# EAGLE board 001000-003 (EAGLE 9.4.0), part 1 of 2
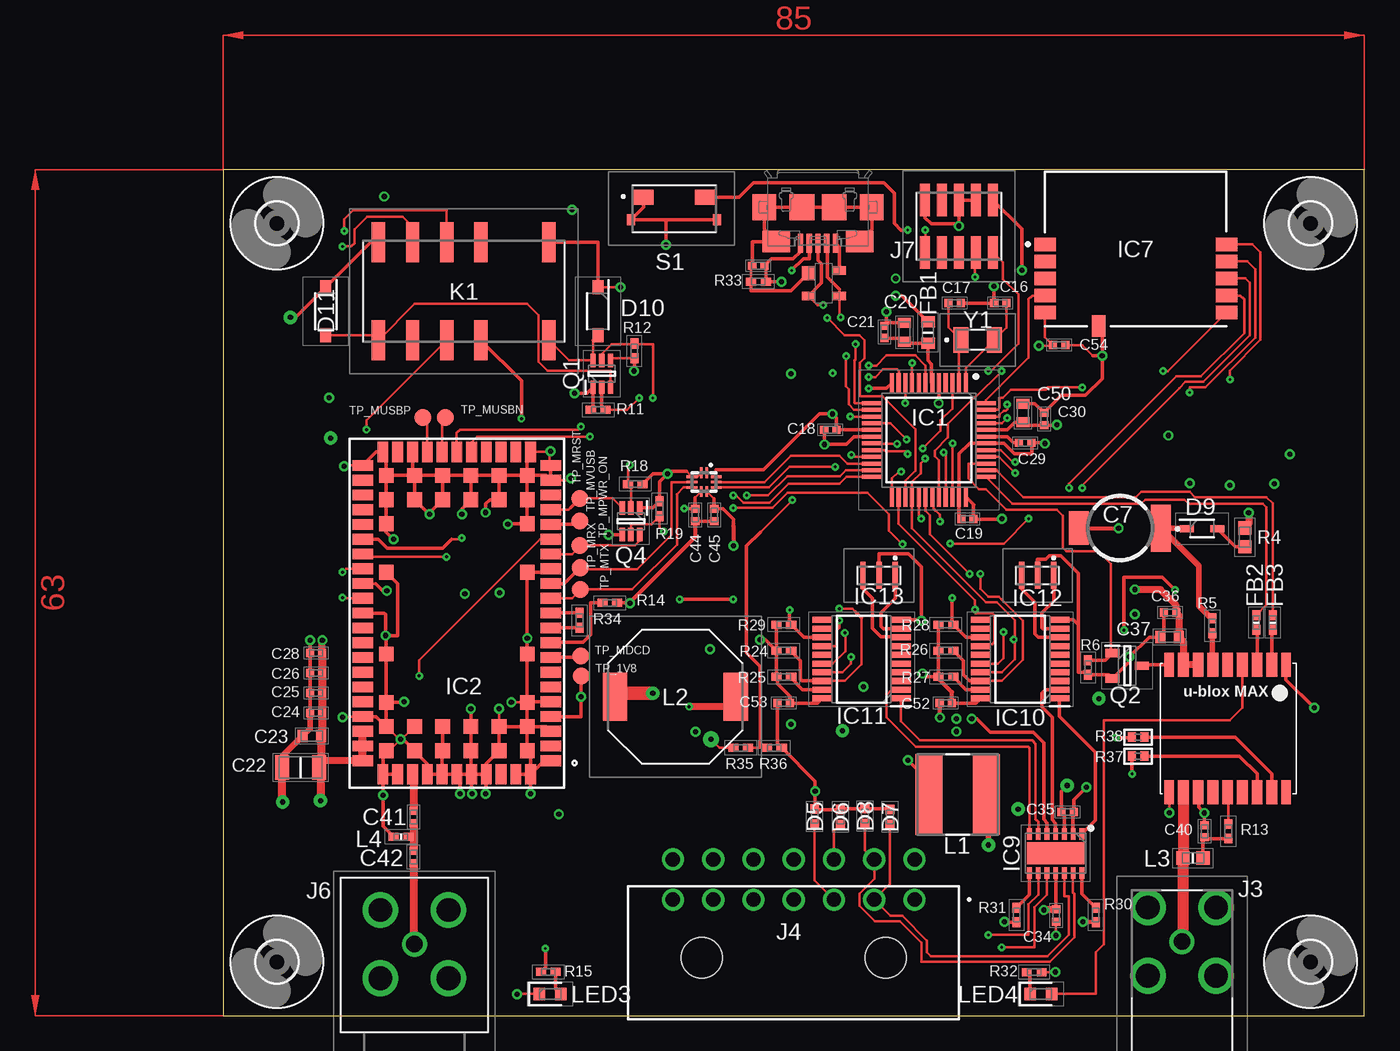
[diagram p0: board, top side]
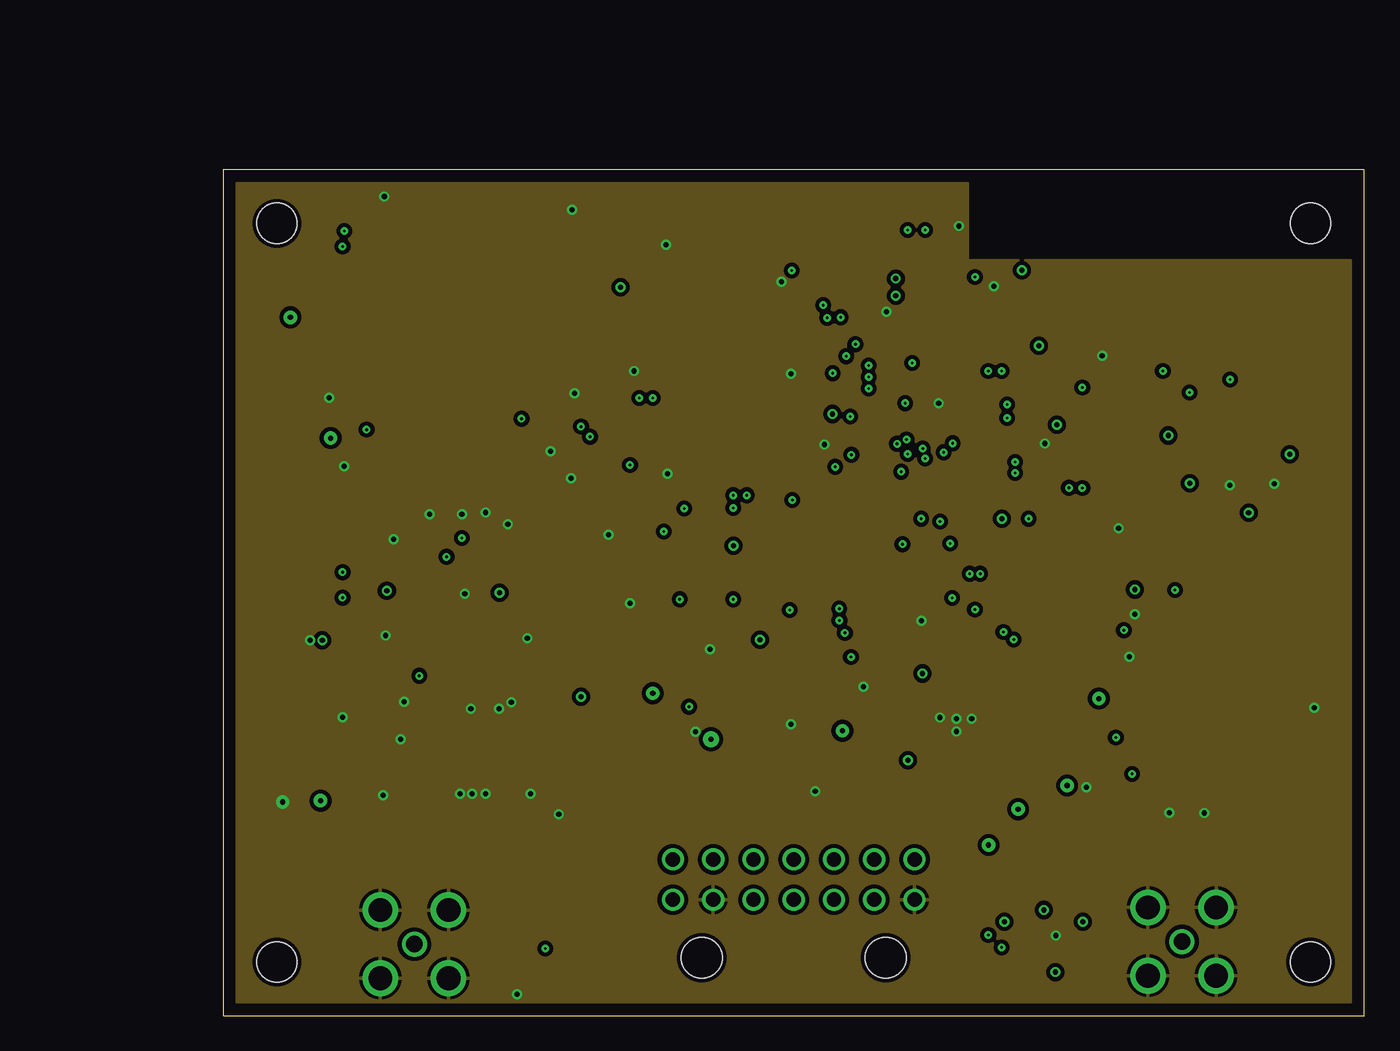
[diagram p1: board, inner layer Route2]
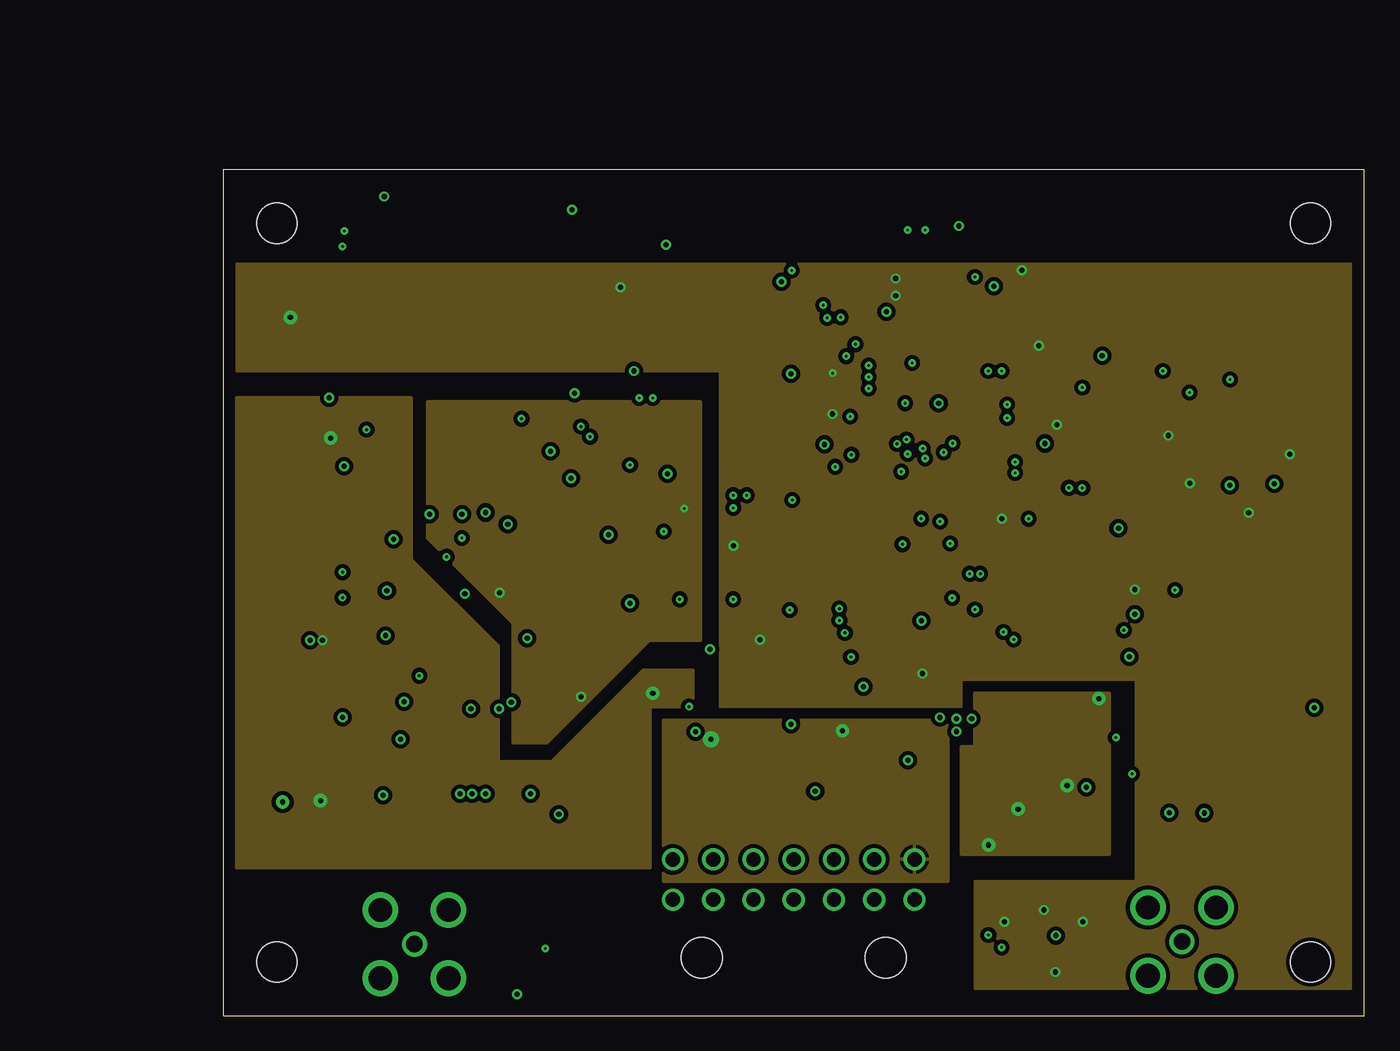
[diagram p2: board, inner layer Route15]
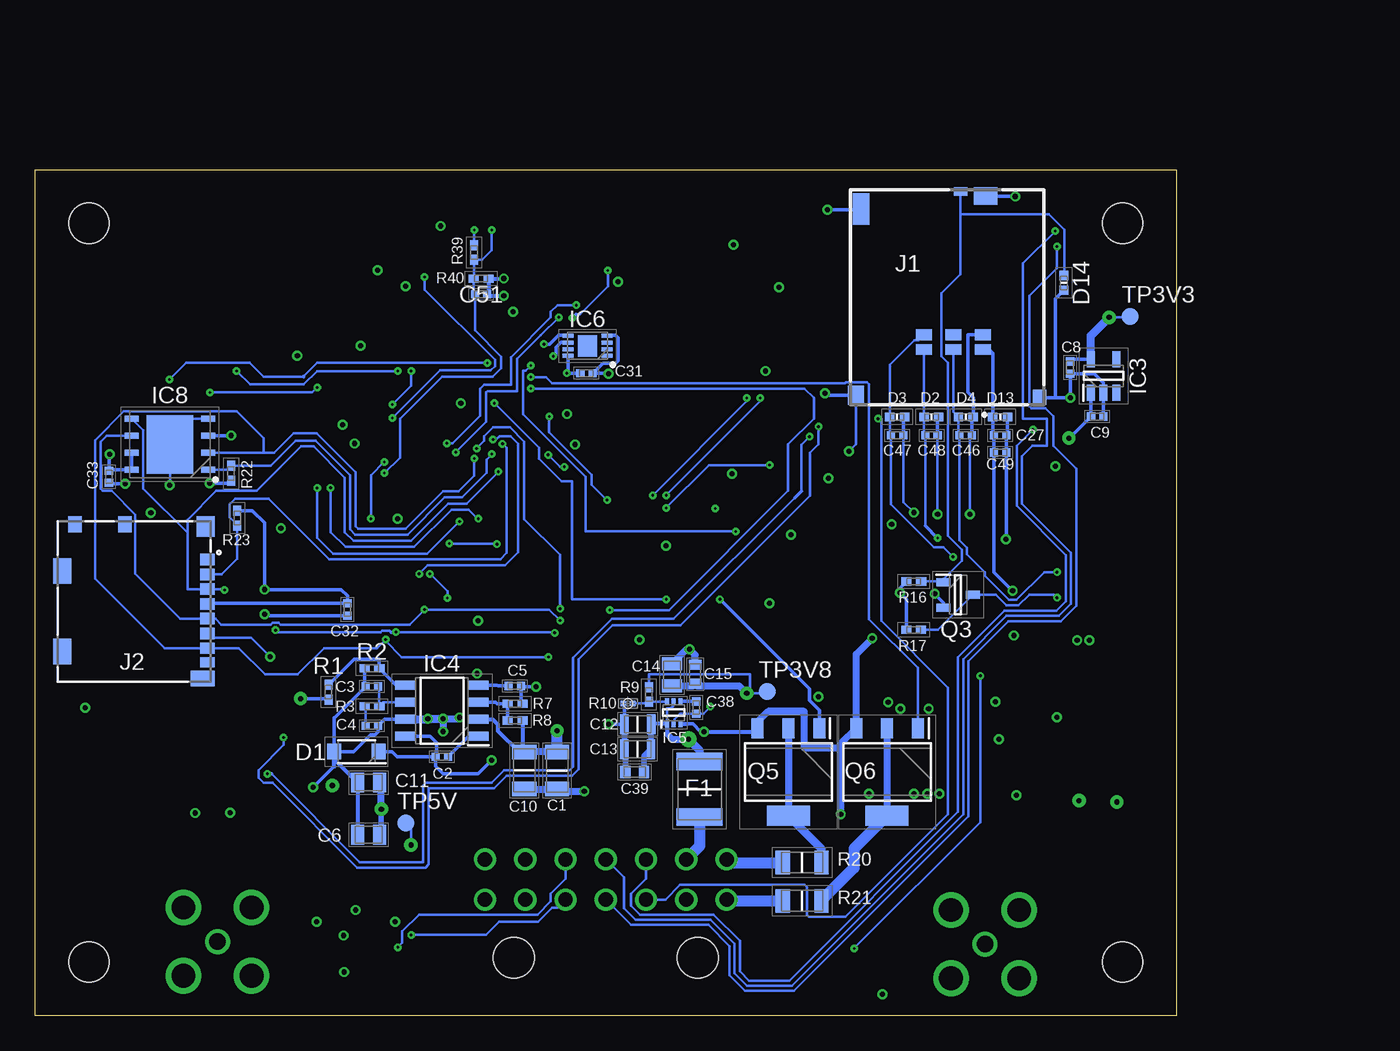
[diagram p3: board, bottom side, seen from below]

Size 85 x 63 mm. Coordinates in mm from the lower left corner, seen from the top.
Outline: 0,0 85,0 85,63 0,63 0,0
Copper layers (1*2*15*16): Top 0.035559375mm / dielectric 0.47751875mm / Route2 0.035559375mm / dielectric 0.47751875mm / Route15 0.035559375mm / dielectric 0.47751875mm / Bottom 0.035559375mm
Design rules "SparkFun-4-layer-TIGHT": minimum track width 7mil, minimum drill 15mil, track to track 7mil, track to pad 7mil, pad to pad 7mil, via to via 7mil, smd to smd 7mil, copper to edge 7mil, drill to drill 7mil, minimum pad ring 7mil, minimum via ring 7mil, stop-mask expansion 4mil, vias tented up to drill 25mil, thermal gap 10mil
Net classes: 1 ant_wide: width 0.8 mm; 2 signal: width 0.203 mm, drill 0.203 mm, clearance 0.152 mm

## Footprints (pad centres in the part's own frame; a part is rotated, then mirrored left to right if it is on the bottom)
CAPC3216X180N = smd 1.07 x 1.82: 1 -1.38,0; 2 1.38,0
CAPC1005X55N = smd 0.6 x 0.62: 1 -0.46,0; 2 0.46,0
CAPC2012X145N = smd 0.97 x 1.47: 1 -0.83,0; 2 0.83,0
DSK-414_HL = smd 3.5 x 1.5: 1 0,3.05 | smd 2.5 x 1.5: 2 0,-3.05
CAPC2012X100N = smd 0.62 x 1.47: 1 -1,0; 2 1,0
CAPC1608X90N = smd 0.75 x 0.94: 1 -0.7,0; 2 0.7,0
SODFL3617X108N = smd 1.03 x 1.17: 1 -1.65,0; 2 1.65,0
DIONC1005X43N = smd 0.7 x 0.65: 1 -0.55,0; 2 0.55,0
SOD2513X110N = smd 1.05 x 0.5: 1 -1.138,0; 2 1.138,0
SOD3716X135N = smd 1.05 x 0.85: 1 -1.8,0; 2 1.8,0
SOT190P230X110-4N = smd 1 x 1: 1 -1.15,0.75 | smd 1 x 0.6: 2 -1.15,-0.95; 3 1.15,-0.95; 4 1.15,0.95
FUSC4632X62N = smd 1.31 x 3.43: 1 -2.065,0; 2 2.065,0
BEADC1608X95N = smd 0.85 x 1: 1 -0.8,0; 2 0.8,0
BEADC1005X55N = smd 0.75 x 0.6: 1 -0.55,0; 2 0.55,0
3,0 = hole 3: 0,0
QFP50P900X900X120-48N = smd 1.475 x 0.3: 1 -4.238,2.75; 2 -4.238,2.25; 3 -4.238,1.75; 4 -4.238,1.25; 5 -4.238,0.75; 6 -4.238,0.25; 7 -4.238,-0.25; 8 -4.238,-0.75; 9 -4.238,-1.25; 10 -4.238,-1.75; 11 -4.238,-2.25; 12 -4.238,-2.75; 25 4.238,-2.75; 26 4.238,-2.25; 27 4.238,-1.75; 28 4.238,-1.25; 29 4.238,-0.75; 30 4.238,-0.25; 31 4.238,0.25; 32 4.238,0.75; 33 4.238,1.25; 34 4.238,1.75; 35 4.238,2.25; 36 4.238,2.75 | smd 0.3 x 1.475: 13 -2.75,-4.238; 14 -2.25,-4.238; 15 -1.75,-4.238; 16 -1.25,-4.238; 17 -0.75,-4.238; 18 -0.25,-4.238; 19 0.25,-4.238; 20 0.75,-4.238; 21 1.25,-4.238; 22 1.75,-4.238; 23 2.25,-4.238; 24 2.75,-4.238; 37 2.75,4.238; 38 2.25,4.238; 39 1.75,4.238; 40 1.25,4.238; 41 0.75,4.238; 42 0.25,4.238; 43 -0.25,4.238; 44 -0.75,4.238; 45 -1.25,4.238; 46 -1.75,4.238; 47 -2.25,4.238; 48 -2.75,4.238
SARA-U201-03B = smd 1.5 x 0.8: 1 1,11; 2 1,9.9; 3 1,8.8; 4 1,7.7; 5 1,6.6; 6 1,5.5; 7 1,4.4; 8 1,3.3; 9 1,2.2; 10 1,1.1; 11 1,0; 12 1,-1.1; 13 1,-2.2; 14 1,-3.3; 15 1,-4.4; 16 1,-5.5; 17 1,-6.6; 18 1,-7.7; 19 1,-8.8; 20 1,-9.9; 21 1,-11; 33 15,-11; 34 15,-9.9; 35 15,-8.8; 36 15,-7.7; 37 15,-6.6; 38 15,-5.5; 39 15,-4.4; 40 15,-3.3; 41 15,-2.2; 42 15,-1.1; 43 15,0; 44 15,1.1; 45 15,2.2; 46 15,3.3; 47 15,4.4; 48 15,5.5; 49 15,6.6; 50 15,7.7; 51 15,8.8; 52 15,9.9; 53 15,11 | smd 0.8 x 1.5: 22 2.5,-12; 23 3.6,-12; 24 4.7,-12; 25 5.8,-12; 26 6.9,-12; 27 8,-12; 28 9.1,-12; 29 10.2,-12; 30 11.3,-12; 31 12.4,-12; 32 13.5,-12; 54 13.5,12; 55 12.4,12; 56 11.3,12; 57 10.2,12; 58 9.1,12; 59 8,12; 60 6.9,12; 61 5.8,12; 62 4.7,12; 63 3.6,12; 64 2.5,12 | smd 1.1 x 1.1: 65 2.75,10.25; 66 4.85,10.25; 67 6.95,10.25; 68 9.05,10.25; 69 11.15,10.25; 70 13.25,10.25; 71 2.75,8.45; 72 4.85,8.45; 73 6.95,8.45; 74 9.05,8.45; 75 11.15,8.45; 76 13.25,8.45; 77 2.75,6.65; 78 13.25,6.65; 79 2.75,3.05; 80 13.25,3.05; 81 2.75,-3.05; 82 13.25,-3.05; 83 2.75,-6.65; 84 13.25,-6.65; 85 2.75,-8.45; 86 4.85,-8.45; 87 6.95,-8.45; 88 9.05,-8.45; 89 11.15,-8.45; 90 13.25,-8.45; 91 2.75,-10.25; 92 4.85,-10.25; 93 6.95,-10.25; 94 9.05,-10.25; 95 11.15,-10.25; 96 13.25,-10.25
SOT95P282X130-5N = smd 1.2 x 0.6: 1 -1.25,0.95; 2 -1.25,0; 3 -1.25,-0.95; 4 1.25,-0.95; 5 1.25,0.95
SOIC127P600X175-8N = smd 1.525 x 0.65: 1 -2.712,1.905; 2 -2.712,0.635; 3 -2.712,-0.635; 4 -2.712,-1.905; 5 2.712,-1.905; 6 2.712,-0.635; 7 2.712,0.635; 8 2.712,1.905
SOTFL50P160X60-6N = smd 0.475 x 0.3: 1 -0.838,0.5; 2 -0.838,0; 3 -0.838,-0.5; 4 0.838,-0.5; 5 0.838,0; 6 0.838,0.5
SON50P300X200X60-9N = smd 0.85 x 0.3: 1 -1.45,0.75; 2 -1.45,0.25; 3 -1.45,-0.25; 4 -1.45,-0.75; 5 1.45,-0.75; 6 1.45,-0.25; 7 1.45,0.25; 8 1.45,0.75 | smd 1.4 x 1.6: 9 0,0
XCVR_SPBTLE-RF = smd 1.6 x 1: 1 -6.75,0.33; 2 -6.75,-0.94; 3 -6.75,-2.21; 4 -6.75,-3.48; 5 -6.75,-4.75; 7 6.75,-4.75; 8 6.75,-3.48; 9 6.75,-2.21; 10 6.75,-0.94; 11 6.75,0.33 | smd 1 x 1.6: 6 -2.75,-5.75
SON127P600X500X80-9N = smd 1.05 x 0.45: 1 -2.85,1.905; 2 -2.85,0.635; 3 -2.85,-0.635; 4 -2.85,-1.905; 5 2.85,-1.905; 6 2.85,-0.635; 7 2.85,0.635; 8 2.85,1.905 | smd 3.45 x 4.35: 9 0,0
SON65P300X450X100-15N = smd 0.85 x 0.35: 1 -1.45,1.95; 2 -1.45,1.3; 3 -1.45,0.65; 4 -1.45,0; 5 -1.45,-0.65; 6 -1.45,-1.3; 7 -1.45,-1.95; 8 1.45,-1.95; 9 1.45,-1.3; 10 1.45,-0.65; 11 1.45,0; 12 1.45,0.65; 13 1.45,1.3; 14 1.45,1.95 | smd 1.65 x 4.25: 15 0,0
SOP65P640X120-20N = smd 1.475 x 0.45: 1 -2.938,2.925; 2 -2.938,2.275; 3 -2.938,1.625; 4 -2.938,0.975; 5 -2.938,0.325; 6 -2.938,-0.325; 7 -2.938,-0.975; 8 -2.938,-1.625; 9 -2.938,-2.275; 10 -2.938,-2.925; 11 2.938,-2.925; 12 2.938,-2.275; 13 2.938,-1.625; 14 2.938,-0.975; 15 2.938,-0.325; 16 2.938,0.325; 17 2.938,0.975; 18 2.938,1.625; 19 2.938,2.275; 20 2.938,2.925
CSTCE16M0V53CR0 = smd 0.4 x 2: 1 1.2,0; 2 0,0; 3 -1.2,0
SF56S006V4BR2000 = smd 1.2 x 0.8: 1 2.66,-12.09; 2 0.47,-12.09; 3 -1.72,-12.09; 4 2.66,-10.99; 5 0.47,-10.99; 6 -1.72,-10.99 | smd 1.75 x 1.3: 7 2.87,-0.65 | smd 1 x 0.65: 8 1,-0.325 | smd 1.2 x 2.35: 9 -6.4,-1.625 | smd 1.2 x 1.4: 10 -6.8,-15.5 | smd 1 x 1.1: 11 6.9,-15.65
1040310811 = smd 0.85 x 1.1: 1 3.105,0.25; 2 2.005,0.25; 3 0.905,0.25; 4 -0.195,0.25; 5 -1.295,0.25; 6 -2.395,0.25; 7 -3.495,0.25 | smd 0.75 x 1.1: 8 -4.545,0.25 | smd 1.17 x 1.8: 9 -5.755,0.6 | smd 1.9 x 1.35: 10 -3.73,11.075; 11 2.24,11.075 | smd 1.2 x 1: 12 5.74,10.1; 13 5.74,6.4 | smd 1.55 x 1.35: 14 5.565,0.375
FA1NCRPPCB8 = drill 1.77 pad 2.655: 1 3.85,-2.54; 2 8.93,-2.54; 3 8.93,2.54; 4 3.85,2.54 | drill 1.24 pad 1.86: 5 6.39,0
43045-1400 = drill 1.07 pad 1.65: 1 9,8.92; 2 6,8.92; 3 3,8.92; 4 0,8.92; 5 -3,8.92; 6 -6,8.92; 7 -9,8.92; 8 9,11.92; 9 6,11.92; 10 3,11.92; 11 0,11.92; 12 -3,11.92; 13 -6,11.92; 14 -9,11.92 | hole 3.05: -6.85,4.6; 6.85,4.6
ZX62-AB-5PA = smd 0.4 x 1.35: 1 -1.3,3.025; 2 -0.65,3.025; 3 0,3.025; 4 0.65,3.025; 5 1.3,3.025 | smd 2.1 x 1.6: 6 3.1,2.9; 11 -3.1,2.9 | smd 1.8 x 1.9: 7 4,0.35; 10 -4,0.35 | smd 1.9 x 1.9: 8 1.2,0.35; 9 -1.2,0.35
FA1NDRPPCB8 = drill 1.77 pad 2.655: 1 0,0; 2 5.08,0; 3 0,-5.08; 4 5.08,-5.08 | drill 1.24 pad 1.86: 5 2.54,-2.54
M503600542R = smd 0.74 x 2.4: 1 -2.54,-1.95; 2 -2.54,1.95; 3 -1.27,-1.95; 4 -1.27,1.95; 5 0,-1.95; 6 0,1.95; 7 1.27,-1.95; 8 1.27,1.95; 9 2.54,-1.95; 10 2.54,1.95
EE25TNU = smd 1 x 3: 1 -6.35,-3.645; 3 -1.27,-3.645; 4 1.27,-3.645; 5 3.81,-3.645; 6 6.35,-3.645; 7 6.35,3.645; 8 3.81,3.645; 9 1.27,3.645; 10 -1.27,3.645; 12 -6.35,3.645
SRN6045_1 = smd 2.01 x 6: 1 -2.15,0; 2 2.15,0
SRU10484R7Y = smd 1.8 x 3.6: 1 -4.5,0; 2 4.5,0
INDC1608X95N = smd 1 x 1: 1 -0.75,0; 2 0.75,0
INDC1005X55N = smd 0.75 x 0.6: 1 -0.55,0; 2 0.55,0
LEDC1608X90N = smd 0.85 x 0.95: 1 -0.8,0; 2 0.8,0
LEDC1608X80N = smd 0.85 x 0.95: 1 -0.8,0; 2 0.8,0
SOT65P210X100-6N = smd 1 x 0.4: 1 -1,0.65; 2 -1,0; 3 -1,-0.65; 4 1,-0.65; 5 1,0; 6 1,0.65
SOT95P230X110-3N = smd 1.05 x 0.6: 1 -1.1,0.95; 2 -1.1,-0.95; 3 1.1,0
SOT230P700X170-4N = smd 1.5 x 0.9: 1 -3.25,2.3; 2 -3.25,0; 3 -3.25,-2.3 | smd 1.5 x 3.2: 4 3.25,0
RESC1005X40N = smd 0.75 x 0.6: 1 -0.55,0; 2 0.55,0
RESC1508X50N = smd 1 x 0.95: 1 -0.7,0; 2 0.7,0
RESC0603X26N = smd 0.44 x 0.42: 1 -0.34,0; 2 0.34,0
RESC1005X35N = smd 0.7 x 0.6: 1 -0.55,0; 2 0.55,0
RESC3116X65N = smd 1.05 x 1.75: 1 -1.45,0; 2 1.45,0
R0402 = smd 0.6 x 0.7: 1 -0.476,0; 2 0.476,0
TL4100AF120QG = smd 1.45 x 1.1: 1 -2.075,0.837; 2 2.475,0.837 | smd 0.6 x 0.85: 3 -3,-0.838; 4 3.4,-0.838
B1,27 = smd 1.27 x 1.27: TP 0,0
RSW(RPUQFNN10) = smd 0.2 x 0.8: 1 -0.2,-0.7; 2 0.2,-0.7; 6 0.2,0.7; 7 -0.2,0.7 | smd 0.8 x 0.2: 3 0.9,-0.4; 4 0.9,0; 5 0.9,0.4; 8 -0.9,0.4; 9 -0.9,0; 10 -0.9,-0.4
MAX-M8 = smd 1.8 x 0.7: 1_GND 4.95,-4.4; 9_RESET_N 4.95,4.3; 10_GND -4.55,4.3; 18_SAFEBOOT_N -4.55,-4.4 | smd 1.8 x 0.8: 2_TXD 4.95,-3.35; 3_RXD 4.95,-2.25; 4_TIMEPULSE 4.95,-1.15; 5_EXTINT 4.95,-0.05; 6_V_BCKP 4.95,1.05; 7_VCC_IO 4.95,2.15; 8_VCC 4.95,3.25; 11_RF_IN -4.55,3.25; 12_GND -4.55,2.15; 13_LNA_EN -4.55,1.05; 14_VCC_RF -4.55,-0.05; 15_V_ANT/RESERVED -4.55,-1.15; 16_SDA -4.55,-2.25; 17_SCL -4.55,-3.35
ABS0716632768KHZT = smd 1.1 x 1.9: 1 -1.25,0; 2 1.25,0

## Placement (x,y rotation side)
C1  C3216X7R1V106K160AC  [CAPC3216X180N]  46.13,18.24 90 bottom
C2  100n  [CAPC1005X55N]  54.71,19.27 0 bottom
C3  10p  [CAPC1005X55N]  59.92,24.49 0 bottom
C4  2n2  [CAPC1005X55N]  59.92,21.58 180 bottom
C5  8n2  [CAPC1005X55N]  49.28,24.55 180 bottom
C6  10u  [CAPC2012X145N]  60.17,13.46 0 bottom
C7  DSK-3R3H224U-HL  [DSK-414_HL]  66.8,36.3 270 top
C8  1u  [CAPC1005X55N]  7.92,48.25 90 bottom
C9  1u  [CAPC1005X55N]  5.89,44.6 180 bottom
C10  C3216X7R1V106K160AC  [CAPC3216X180N]  48.58,18.26 90 bottom
C11  10u  [CAPC2012X145N]  60.17,17.35 0 bottom
C12  C2012X5R1V106K085AC  [CAPC2012X100N]  40.12,21.69 0 bottom
C13  C2012X5R1V106K085AC  [CAPC2012X100N]  40.13,19.83 0 bottom
C14  C2012X5R1A336M125AC  [CAPC2012X145N]  37.56,25.37 270 bottom
C15  GRM188R71H104KA93D  [CAPC1608X90N]  35.85,25.41 270 bottom
C16  20p  [CAPC1005X55N]  57.89,53.06 0 top
C17  20p  [CAPC1005X55N]  54.48,53.06 180 top
C18  100n  [CAPC1005X55N]  45.23,43.63 0 top
C19  100n  [CAPC1005X55N]  55.44,36.97 0 top
C20  10u  [CAPC1608X90N]  50.75,50.89 270 top
C21  100n  [CAPC1005X55N]  49.26,50.92 270 top
C22  100u  [CAPC3216X180N]  5.77,18.46 0 top
C23  10u  [CAPC1608X90N]  6.61,20.82 0 top
C24  100n  [CAPC1005X55N]  6.92,22.54 0 top
C25  10n  [CAPC1005X55N]  6.92,24.03 0 top
C26  68p  [CAPC1005X55N]  6.92,25.52 0 top
C27  100n  [CAPC1005X55N]  13.12,43.21 180 bottom
C28  15p  [CAPC1005X55N]  6.92,27 0 top
C29  1u  [CAPC1005X55N]  59.75,42.65 0 top
C30  100n  [CAPC1005X55N]  61.16,44.44 90 top
C31  100n  [CAPC1005X55N]  43.94,47.84 180 bottom
C32  10u  [CAPC1005X55N]  61.75,30.25 90 bottom
C33  100n  [CAPC1005X55N]  79.51,40.13 90 bottom
C34  100n  [CAPC1005X55N]  62.05,7.46 90 top
C35  100n  [CAPC1005X55N]  62.91,15.16 0 top
C36  47p  [CAPC1005X55N]  70.53,30.01 180 top
C37  1u  [CAPC1608X90N]  70.5,28.19 180 top
C38  100n  [CAPC1005X55N]  35.75,22.93 90 bottom
C39  GRM188R71H104KA93D  [CAPC1608X90N]  40.35,18.15 0 bottom
C40  10n  [CAPC1005X55N]  73.11,13.73 270 top
C41  GRM1555C1H150JA01J  [CAPC1005X55N]  14.18,14.79 270 top
C42  GRM1555C1H330JA01J  [CAPC1005X55N]  14.18,11.82 270 top
C43  4n7  [CAPC1005X55N]  39.87,55.84 0 top
C44  100n  [CAPC1005X55N]  35.16,37.28 270 top
C45  100n  [CAPC1005X55N]  36.58,37.28 90 top
C46  GRM1555C1H470JA01D  [CAPC1005X55N]  15.68,43.21 180 bottom
C47  GRM1555C1H470JA01D  [CAPC1005X55N]  20.79,43.21 180 bottom
C48  GRM1555C1H470JA01D  [CAPC1005X55N]  18.24,43.21 180 bottom
C49  GRM1555C1H470JA01D  [CAPC1005X55N]  13.12,41.93 180 bottom
C50  10u  [CAPC1608X90N]  59.57,44.88 90 top
C51  GCM1555C1H101JA16D  [CAPC1005X55N]  51.79,53.72 0 bottom
C52  100n  [CAPC1005X55N]  53.83,23.27 180 top
C53  100n  [CAPC1005X55N]  41.77,23.27 180 top
C54  100n  [CAPC1005X55N]  62.28,49.93 180 top
D1  SS13FL  [SODFL3617X108N]  61.08,19.65 180 bottom
D2  PESD0402-140  [DIONC1005X43N]  18.24,44.58 180 bottom
D3  PESD0402-140  [DIONC1005X43N]  20.79,44.58 180 bottom
D4  PESD0402-140  [DIONC1005X43N]  15.68,44.58 180 bottom
D5  PESD0402-140  [DIONC1005X43N]  44.06,14.82 270 top
D6  PESD0402-140  [DIONC1005X43N]  45.98,14.79 270 top
D7  PESD0402-140  [DIONC1005X43N]  49.67,14.79 270 top
D8  PESD0402-140  [DIONC1005X43N]  47.81,14.86 270 top
D9  BAT60AE6327HTSA1  [SOD2513X110N]  72.93,36.26 0 top
D10  MBR0560-TP  [SOD3716X135N]  27.92,52.45 270 top
D11  MBR0560-TP  [SOD3716X135N]  7.63,52.45 270 top
D12  PRTR5V  [SOT190P230X110-4N]  44.74,54.53 0 top
D13  PESD0402-140  [DIONC1005X43N]  13.12,44.58 180 bottom
D14  PESD0402-140  [DIONC1005X43N]  8.38,54.56 90 bottom
F1  MINISMDC050F-2  [FUSC4632X62N]  35.51,16.86 270 bottom
FB1  BLM18PG471SZ1D  [BEADC1608X95N]  52.5,50.87 270 top
FB2  BLM15HD102SN1D  [BEADC1005X55N]  76.95,29.27 90 top
FB3  BLM15HD102SN1D  [BEADC1005X55N]  78.19,29.27 90 top
H1  MOUNT-HOLE3.0  [3,0]  81,59 0 top
H4  MOUNT-HOLE3.0  [3,0]  81,4 0 top
H5  MOUNT-HOLE3.0  [3,0]  4,4 0 top
H6  MOUNT-HOLE3.0  [3,0]  4,59 0 top
IC1  ATSAMD21G18A-AU  [QFP50P900X900X120-48N]  52.57,42.86 270 top
IC2  SARA-R410M-02B  [SARA-U201-03B]  25.4,29.97 180 top
IC3  AP2112K-3.3TRG1  [SOT95P282X130-5N]  5.42,47.63 90 bottom
IC4  TPS54232D  [SOIC127P600X175-8N]  54.71,22.7 180 bottom
IC5  TPS563231DRLR  [SOTFL50P160X60-6N]  37.44,22.56 90 bottom
IC6  ATECC508A-MAHDA-T  [SON50P300X200X60-9N]  43.86,49.87 180 bottom
IC7  SPBTLE-RF  [XCVR_SPBTLE-RF]  67.98,57.1 0 top
IC8  W25Q16JVZPIQ  [SON127P600X500X80-9N]  74.96,42.54 180 bottom
IC9  TJA1048TK,118  [SON65P300X450X100-15N]  62.01,12.08 270 top
IC10  MCP2515T-I_ST  [SOP65P640X120-20N]  59.37,26.54 180 top
IC11  MCP2515T-I_ST  [SOP65P640X120-20N]  47.56,26.54 180 top
IC12  CSTCE16M0V53C-R0  [CSTCE16M0V53CR0]  60.67,32.78 0 top
IC13  CSTCE16M0V53C-R0  [CSTCE16M0V53CR0]  48.86,32.78 0 top
J1  SF56S006V4BR2000  [SF56S006V4BR2000]  17.08,61.7 0 bottom
J2  1040310811  [1040310811]  71.93,30.85 90 bottom
J3  FA1-NCRP-PCB-8  [FA1NCRPPCB8]  71.43,-0.88 90 top
J4  43045-1400  [43045-1400]  42.5,-0.29 0 top
J5  -  [ZX62-AB-5PA]  44.31,60.54 180 top
J6  FA1-NDRP-PCB-8  [FA1NDRPPCB8]  11.7,7.86 0 top
J7  M50-3600542R  [M503600542R]  54.81,58.78 180 top
K1  EE2-3TNU-L  [EE25TNU]  17.92,53.94 180 top
L1  SRN6045-150M  [SRN6045_1]  54.72,16.46 0 top
L2  SRU1048-4R7Y  [SRU10484R7Y]  33.68,23.74 180 top
L3  27nH  [INDC1608X95N]  72.24,11.72 180 top
L4  LQG15HN39NJ02D  [INDC1005X55N]  13.25,13.31 0 top
LED3  HSMS-C190  [LEDC1608X90N]  24.35,1.61 0 top
LED4  HSMR-C190  [LEDC1608X80N]  60.91,1.61 0 top
Q1  2N7002DW-7-F  [SOT65P210X100-6N]  28.2,47.79 90 top
Q2  2N7002,215  [SOT95P230X110-3N]  67.34,26.05 0 top
Q3  2N7002,215  [SOT95P230X110-3N]  16.26,31.33 0 bottom
Q4  2N7002DW-7-F  [SOT65P210X100-6N]  30.37,36.81 270 top
Q5  BSP76E6433HUMA1  [SOT230P700X170-4N]  28.89,18.14 270 bottom
Q6  BSP76E6433HUMA1  [SOT230P700X170-4N]  21.54,18.14 270 bottom
R1  10k2  [RESC1005X40N]  63.16,24.08 270 bottom
R2  1k96  [RESC1005X40N]  59.92,25.87 0 bottom
R3  28k  [RESC1005X40N]  59.92,23.04 0 bottom
R4  10k  [RESC1508X50N]  76.11,35.62 90 top
R5  0R  [RESC1005X40N]  73.68,29.03 90 top
R6  1M2  [RESC1005X40N]  64.42,25.92 90 top
R7  CRCW040237K4FKED  [RESC1005X40N]  49.26,23.22 180 bottom
R8  CRCW0402169KFKED  [RESC1005X40N]  49.26,21.97 0 bottom
R9  CRCW040253K6FKED  [RESC1005X40N]  39.29,23.91 90 bottom
R10  RC0201FR-0710KL  [RESC0603X26N]  40.85,23.24 0 bottom
R11  1M2  [RESC1005X40N]  27.93,45.1 0 top
R12  1M2  [RESC1005X40N]  30.63,49.5 90 top
R13  10R  [RESC1005X35N]  74.87,13.73 90 top
R14  0R  [RESC1005X40N]  28.8,30.73 0 top
R15  10k2  [RESC1005X40N]  24.22,3.25 180 top
R16  1M2  [RESC1005X40N]  19.55,32.33 180 bottom
R17  1M2  [RESC1005X40N]  19.57,28.72 180 bottom
R18  1M2  [RESC1005X40N]  30.7,39.58 180 top
R19  1M2  [RESC1005X40N]  32.51,37.75 270 top
R20  0R  [RESC3116X65N]  27.87,11.4 180 bottom
R21  0R  [RESC3116X65N]  27.87,8.54 180 bottom
R22  10k2  [RESC1005X40N]  70.42,40.38 270 bottom
R23  10k2  [RESC1005X40N]  69.95,37.04 90 bottom
R24  10k2  [RESC1005X40N]  41.77,27.17 180 top
R25  10k2  [RESC1005X40N]  41.77,25.22 180 top
R26  10k2  [RESC1005X40N]  53.83,27.17 180 top
R27  10k2  [RESC1005X40N]  53.83,25.22 180 top
R28  10k2  [RESC1005X40N]  53.83,29.11 180 top
R29  10k2  [RESC1005X40N]  41.77,29.11 180 top
R30  10k2  [RESC1005X40N]  64.99,7.49 270 top
R31  10k2  [RESC1005X40N]  59.1,7.49 270 top
R32  470R  [RESC1005X35N]  60.41,3.24 0 top
R33  1M2  [RESC1005X40N]  39.87,54.66 180 top
R34  0R  [RESC1005X40N]  26.54,29.44 270 top
R35  40k2  [RESC1005X40N]  38.55,19.93 180 top
R36  10k2  [RESC1005X40N]  41.06,19.93 180 top
R37  DNP  [R0402]  68.16,19.32 0 top
R38  DNP  [R0402]  68.16,20.73 0 top
R39  39R  [RESC1005X40N]  52.31,56.82 270 bottom
R40  10k2  [RESC1005X40N]  51.79,54.89 0 bottom
S1  TL4100AF120QG  [TL4100AF120QG]  33.39,60.1 0 top
TP3V3  TPB1,27  [B1,27]  3.43,52.07 0 bottom
TP3V8  TPB1,27  [B1,27]  30.48,24.13 0 bottom
TP5V  TPB1,27  [B1,27]  57.4,14.35 0 bottom
TP_1V8  TPB1,27  [B1,27]  26.67,25.29 0 top
TP_MDCD  TPB1,27  [B1,27]  26.63,26.77 0 top
TP_MPWR_ON  TPB1,27  [B1,27]  26.55,35.02 0 top
TP_MRST  TPB1,27  [B1,27]  26.58,38.51 0 top
TP_MRX  TPB1,27  [B1,27]  26.59,33.35 0 top
TP_MTX  TPB1,27  [B1,27]  26.61,31.73 0 top
TP_MUSBN  TPB1,27  [B1,27]  16.53,44.55 0 top
TP_MUSBP  TPB1,27  [B1,27]  14.86,44.55 0 top
TP_MVUSB  TPB1,27  [B1,27]  26.58,36.83 0 top
U1  SN74AVC2T245RSWR  [RSW(RPUQFNN10)]  35.82,39.73 180 top
U$1  MAX-M8  [MAX-M8]  74.77,21.17 90 top
Y1  ABS07-32.768KHZ-1-T  [ABS0716632768KHZT]  56.2,50.32 0 top

## Library data of the parts
C1 C10 = SamacSys_Parts; DESCRIPTION: Multilayer Ceramic Capacitors MLCC - SMD/SMT 10UF 35V 10% 1206; HEIGHT: 1.8mm; MANUFACTURER_NAME: TDK; MANUFACTURER_PART_NUMBER: C3216X7R1V106K160AC; MOUSER_PART_NUMBER: 810-C3216X7R1V106KAC; MOUSER_PRICE-STOCK: https://www.mouser.com/Search/Refine.aspx?Keyword=810-C3216X7R1V106KAC
C2 C18 C19 C21 C24 C27 C30 C31 C33-C35 C38 C44 C45 C52-C54 = SamacSys_Parts; DESCRIPTION: Multilayer Ceramic Capacitors MLCC - SMD/SMT 0.1uF 16Volts X7R 10%; HEIGHT: 0.55mm; MANUFACTURER_NAME: Murata Electronics; MANUFACTURER_PART_NUMBER: GCM155R71C104KA55J
C3 = SamacSys_Parts; DESCRIPTION: Multilayer Ceramic Capacitors MLCC - SMD/SMT 0402 10pF 50volts C0G 5%; HEIGHT: 0.55mm; MANUFACTURER_NAME: Murata Electronics; MANUFACTURER_PART_NUMBER: GCM1555C1H100JA16D
C4 = SamacSys_Parts; DESCRIPTION: Murata 0402 GRM 2.2nF Ceramic Multilayer Capacitor, 50 V dc, +125C, X7R Dielectric, +/-10%; HEIGHT: 0.55mm; MANUFACTURER_NAME: Murata Electronics; MANUFACTURER_PART_NUMBER: GRM155R71H222KA01D; MOUSER_PART_NUMBER: 81-GRM36X222K50; MOUSER_PRICE-STOCK: https://www.mouser.com/Search/Refine.aspx?Keyword=81-GRM36X222K50
C5 = SamacSys_Parts; DESCRIPTION: Chip Capacitor value VALUE1; HEIGHT: 0.55mm; MANUFACTURER_NAME: Murata Electronics; MANUFACTURER_PART_NUMBER: GRM155R71C822KA01D; MOUSER_PART_NUMBER: 81-GRM155R71C822KA1D; MOUSER_PRICE-STOCK: https://www.mouser.com/Search/Refine.aspx?Keyword=81-GRM155R71C822KA1D
C6 C11 = SamacSys_Parts; DESCRIPTION: Capacitor SMD 0805 10uF Murata 0805 GRM 10uF Ceramic Multilayer Capacitor, 16 V dc, +105C, X6S Dielectric, +/-10% SMD; HEIGHT: 1.45mm; MANUFACTURER_NAME: Murata Electronics; MANUFACTURER_PART_NUMBER: GRM21BC81C106KE15L; MOUSER_PART_NUMBER: 81-GRM21BC81C106KE5L; MOUSER_PRICE-STOCK: https://www.mouser.com/Search/Refine.aspx?Keyword=81-GRM21BC81C106KE5L
C7 = SamacSys_Parts; DESCRIPTION: Supercapacitors / Ultracapacitors 3.3V .22F 6.8x2.1; HEIGHT: mm; MANUFACTURER_NAME: Elna; MANUFACTURER_PART_NUMBER: DSK-3R3H224U-HL; MOUSER_PART_NUMBER: 555-DSK3R3H224U-HL
C8 C9 C29 = SamacSys_Parts; DESCRIPTION: Multilayer Ceramic Capacitors MLCC - SMD/SMT 0402 1uF 16volts X5R 20%; HEIGHT: 0.55mm; MANUFACTURER_NAME: Murata Electronics; MANUFACTURER_PART_NUMBER: GRM155R61C105MA12D; MOUSER_PART_NUMBER: 81-GRM155R61C105MA2D; MOUSER_PRICE-STOCK: https://www.mouser.com/Search/Refine.aspx?Keyword=81-GRM155R61C105MA2D
C12 C13 = SamacSys_Parts; DESCRIPTION: Capacitor MLCC 0805 35V 10uF X5R TDK 10uF Multilayer Ceramic Capacitor (MLCC) 35 V dc +/-10% X5R dielectric C SMT max op. temp. +85C; HEIGHT: 1mm; MANUFACTURER_NAME: TDK; MANUFACTURER_PART_NUMBER: C2012X5R1V106K085AC; MOUSER_PART_NUMBER: 810-C2012X5R1V106K0C; MOUSER_PRICE-STOCK: https://www.mouser.com/Search/Refine.aspx?Keyword=810-C2012X5R1V106K0C
C14 = SamacSys_Parts; DESCRIPTION: TDK 0805 C 33uF Ceramic Multilayer Capacitor, 10 V dc, +85C, X5R Dielectric, +/-20%; HEIGHT: 1.45mm; MANUFACTURER_NAME: TDK; MANUFACTURER_PART_NUMBER: C2012X5R1A336M125AC; MOUSER_PART_NUMBER: 810-C2012X5R1A336M; MOUSER_PRICE-STOCK: https://www.mouser.com/Search/Refine.aspx?Keyword=810-C2012X5R1A336M
C15 C39 = SamacSys_Parts; DESCRIPTION: Ceramic SMT capacitor 100nF 50Vdc Murata 0603 GRM 100nF Ceramic Multilayer Capacitor, 50 V dc, +125?C, X7R Dielectric, ?10%; HEIGHT: 0.9mm; MANUFACTURER_NAME: Murata Electronics; MANUFACTURER_PART_NUMBER: GRM188R71H104KA93D; MOUSER_PART_NUMBER: 81-GRM39X104K50D; MOUSER_PRICE-STOCK: https://www.mouser.com/Search/Refine.aspx?Keyword=81-GRM39X104K50D
C16 C17 = SamacSys_Parts; DESCRIPTION: Multilayer Ceramic Capacitors MLCC - SMD/SMT 0402 20pF 50Volts C0G 2%; HEIGHT: 0.55mm; MANUFACTURER_NAME: Murata Electronics; MANUFACTURER_PART_NUMBER: GJM1555C1H200GB01D
C20 C23 C50 = SamacSys_Parts; DESCRIPTION: MURATA - GRM188R60J106KE47D - CAP, MLCC, X5R, 10UF, 6.3V, 0603; HEIGHT: 0.9mm; MANUFACTURER_NAME: Murata Electronics; MANUFACTURER_PART_NUMBER: GRM188R60J106KE47D; MOUSER_PART_NUMBER: 81-GRM188R60J106KE7D; MOUSER_PRICE-STOCK: https://www.mouser.com/Search/Refine.aspx?Keyword=81-GRM188R60J106KE7D
C22 = SamacSys_Parts; DESCRIPTION: Multilayer Ceramic Capacitors MLCC - SMD/SMT 1206 100uF 6.3volts *Derate Voltage/Temp; HEIGHT: 1.8mm; MANUFACTURER_NAME: Murata Electronics; MANUFACTURER_PART_NUMBER: GRM31CD80J107ME39K; MOUSER_PART_NUMBER: 81-GRM31CD80J107ME9K; MOUSER_PRICE-STOCK: https://www.mouser.com/Search/Refine.aspx?Keyword=81-GRM31CD80J107ME9K
C25 C40 = SamacSys_Parts; DESCRIPTION: Ceramic SMT capacitor 10nF 50Vdc; HEIGHT: 0.55mm; MANUFACTURER_NAME: Murata Electronics; MANUFACTURER_PART_NUMBER: GCM155R71H103KA55D; MOUSER_PART_NUMBER: 81-GCM155R71H103KA5D; MOUSER_PRICE-STOCK: https://www.mouser.com/Search/Refine.aspx?Keyword=81-GCM155R71H103KA5D
C26 = SamacSys_Parts; DESCRIPTION: Multilayer Ceramic Capacitors MLCC - SMD/SMT 0402 68pF 50volts C0G 5%; HEIGHT: 0.55mm; MANUFACTURER_NAME: Murata Electronics; MANUFACTURER_PART_NUMBER: GCM1555C1H680JA16D
C28 = SamacSys_Parts; DESCRIPTION: Multilayer Ceramic Capacitors MLCC - SMD/SMT 0402 15pF 50volts C0G 5%; HEIGHT: 0.55mm; MANUFACTURER_NAME: Murata Electronics; MANUFACTURER_PART_NUMBER: GCM1555C1H150JA16D
C32 = SamacSys_Parts; DESCRIPTION: Multilayer Ceramic Capacitors MLCC - SMD/SMT 0402 10uF 6.3volts *Derate Voltage/Temp; HEIGHT: 0.55mm; MANUFACTURER_NAME: Murata Electronics; MANUFACTURER_PART_NUMBER: GRM155C80J106ME11D; MOUSER_PART_NUMBER: 81-GRM155C80J106ME1D; MOUSER_PRICE-STOCK: https://www.mouser.com/Search/Refine.aspx?Keyword=81-GRM155C80J106ME1D
C36 C46-C49 = SamacSys_Parts; DESCRIPTION: Murata 0402 GRM 47pF Ceramic Multilayer Capacitor, 50 V dc, +125C, C0G Dielectric, +/-5% SMD; HEIGHT: 0.55mm; MANUFACTURER_NAME: Murata Electronics; MANUFACTURER_PART_NUMBER: GRM1555C1H470JA01D; MOUSER_PART_NUMBER: 81-GRM1555C1H470JA1D; MOUSER_PRICE-STOCK: https://www.mouser.com/Search/Refine.aspx?Keyword=81-GRM1555C1H470JA1D
C37 = SamacSys_Parts; DESCRIPTION: Multilayer Ceramic Capacitors MLCC - SMD/SMT 0603 35Vdc 1.0uF X6S 10%; HEIGHT: 0.9mm; MANUFACTURER_NAME: Murata Electronics; MANUFACTURER_PART_NUMBER: GRT188C8YA105KE13D; MOUSER_PART_NUMBER: 81-GRT188C8YA105KE3D; MOUSER_PRICE-STOCK: https://www.mouser.com/Search/Refine.aspx?Keyword=81-GRT188C8YA105KE3D
C41 = SamacSys_Parts; DESCRIPTION: Multilayer Ceramic Capacitors MLCC - SMD/SMT 0402 15pF 50volts C0G 5%; HEIGHT: 0.55mm; MANUFACTURER_NAME: Murata Electronics; MANUFACTURER_PART_NUMBER: GRM1555C1H150JA01J; MOUSER_PART_NUMBER: 81-GRM1555C1H150JA1J; MOUSER_PRICE-STOCK: https://www.mouser.com/Search/Refine.aspx?Keyword=81-GRM1555C1H150JA1J
C42 = SamacSys_Parts; DESCRIPTION: Multilayer Ceramic Capacitors MLCC - SMD/SMT 0402 33pF 50volts C0G 5%; HEIGHT: 0.55mm; MANUFACTURER_NAME: Murata Electronics; MANUFACTURER_PART_NUMBER: GRM1555C1H330JA01J; MOUSER_PART_NUMBER: 81-GRM1555C1H330JA1J; MOUSER_PRICE-STOCK: https://www.mouser.com/Search/Refine.aspx?Keyword=81-GRM1555C1H330JA1J
C43 = SamacSys_Parts; DESCRIPTION: Multilayer Ceramic Capacitors MLCC - SMD/SMT 0.0047uF 50volts 10%; HEIGHT: 0.55mm; MANUFACTURER_NAME: Murata Electronics; MANUFACTURER_PART_NUMBER: GRM155R71H472KA01J; MOUSER_PART_NUMBER: 81-GRM155R71H472KA1J; MOUSER_PRICE-STOCK: https://www.mouser.com/Search/Refine.aspx?Keyword=81-GRM155R71H472KA1J
C51 = SamacSys_Parts; DESCRIPTION: Multilayer Ceramic Capacitors MLCC - SMD/SMT 0402 100pF 50volts C0G 5%; HEIGHT: 0.55mm; MANUFACTURER_NAME: Murata Electronics; MANUFACTURER_PART_NUMBER: GCM1555C1H101JA16D
D1 = SamacSys_Parts; DESCRIPTION: Schottky Diodes & Rectifiers 30V, 1A SCHOTTKY; HEIGHT: 1.08mm; MANUFACTURER_NAME: Fairchild Semiconductor; MANUFACTURER_PART_NUMBER: SS13FL; MOUSER_PART_NUMBER: 512-SS13FL; MOUSER_PRICE-STOCK: https://www.mouser.com/Search/Refine.aspx?Keyword=512-SS13FL
D2-D8 D13 D14 = SamacSys_Parts; DESCRIPTION: TVS Diode Bi-Directional PESD0402-140 40V, SOD-923 2-Pin; HEIGHT: 0.43mm; MANUFACTURER_NAME: TE Connectivity; MANUFACTURER_PART_NUMBER: PESD0402-140
D9 = SamacSys_Parts; DESCRIPTION: INFINEON - BAT60AE6327HTSA1 - RECTIFIER, SCHOTTKY, 3A, 10V, SOD-323; HEIGHT: 1.1mm; MANUFACTURER_NAME: Infineon; MANUFACTURER_PART_NUMBER: BAT60AE6327HTSA1; MOUSER_PART_NUMBER: 726-BAT60AE6327HTSA1; MOUSER_PRICE-STOCK: https://www.mouser.com/Search/Refine.aspx?Keyword=726-BAT60AE6327HTSA1
D10 D11 = SamacSys_Parts; DESCRIPTION: Schottky Diodes & Rectifiers 20Vr 14Vrms 20V 5.5A 0.70V 30pF; HEIGHT: 1.35mm; MANUFACTURER_NAME: Micro Commercial Components (MCC); MANUFACTURER_PART_NUMBER: MBR0560-TP; MOUSER_PART_NUMBER: 833-MBR0560-TP; MOUSER_PRICE-STOCK: https://www.mouser.com/Search/Refine.aspx?Keyword=833-MBR0560-TP
D12 = MKRNB1500_V3.0; CODE-ARDUINO: 2209; DATASHEET: http://www.nxp.com/documents/data_sheet/PRTR5V0U2X.pdf; DISTRIBUTOR-LINK: http://www.digikey.com/product-detail/en/nxp-semiconductors/PRTR5V0U2X,215/568-4140-1-ND/1589981; DISTRIBUTOR-PN: 568-4140-1-ND; MANUFACTURER: NXP; MANUFACTURER-PN: PRTR5V0U2X,215
F1 = SamacSys_Parts; DESCRIPTION: LITTELFUSE - MINISMDC050F-2 - POLYSWITCH, 0.5A, 24V, SMD; HEIGHT: 0.62mm; MANUFACTURER_NAME: LITTELFUSE; MANUFACTURER_PART_NUMBER: MINISMDC050F-2; MOUSER_PART_NUMBER: 650-MINISMDC050F-2; MOUSER_PRICE-STOCK: https://www.mouser.com/Search/Refine.aspx?Keyword=650-MINISMDC050F-2
FB1 = SamacSys_Parts; DESCRIPTION: Ferrite Beads 0603 470ohms 1000mA Auto Infotainment; HEIGHT: 0.95mm; MANUFACTURER_NAME: Murata Electronics; MANUFACTURER_PART_NUMBER: BLM18PG471SZ1D; MOUSER_PART_NUMBER: 81-BLM18PG471SZ1D; MOUSER_PRICE-STOCK: https://www.mouser.com/Search/Refine.aspx?Keyword=81-BLM18PG471SZ1D
FB2 FB3 = SamacSys_Parts; DESCRIPTION: MURATA - BLM15HD102SN1D - FERRITE BEAD, 1.25OHM, 250MA, 0402; HEIGHT: 0.55mm; MANUFACTURER_NAME: Murata Electronics; MANUFACTURER_PART_NUMBER: BLM15HD102SN1D; MOUSER_PART_NUMBER: 81-BLM15HD102SN1D; MOUSER_PRICE-STOCK: https://www.mouser.com/Search/Refine.aspx?Keyword=81-BLM15HD102SN1D
H1 H4-H6 = holes
IC1 = SamacSys_Parts; DESCRIPTION: ATMEL - ATSAMD21G18A-AU - MCU, 32BIT, CORTEX-M0+, 48MHZ, TQFP-48; HEIGHT: 1.2mm; MANUFACTURER_NAME: Microchip; MANUFACTURER_PART_NUMBER: ATSAMD21G18A-AU; MOUSER_PART_NUMBER: 556-ATSAMD21G18A-AU; MOUSER_PRICE-STOCK: https://www.mouser.com/Search/Refine.aspx?Keyword=556-ATSAMD21G18A-AU
IC2 = SamacSys_Parts; DESCRIPTION: Size-optimized LTE Cat M1/NB1 and EGPRS modules; HEIGHT: mm; MANUFACTURER_NAME: U-Blox; MANUFACTURER_PART_NUMBER: SARA-R410M-02B
IC3 = SamacSys_Parts; DESCRIPTION: 600mA 3.3V LDO Regulator Enable SOT23-5 DiodesZetex AP2112K-3.3TRG1, LDO Voltage Regulator, 3.3 V +/-1.5%, 2.5 6 Vin, 5-Pin SOT-23; HEIGHT: 1.3mm; MANUFACTURER_NAME: Diodes Inc.; MANUFACTURER_PART_NUMBER: AP2112K-3.3TRG1; MOUSER_PART_NUMBER: 621-AP2112K-3.3TRG1; MOUSER_PRICE-STOCK: https://www.mouser.com/Search/Refine.aspx?Keyword=621-AP2112K-3.3TRG1
IC4 = SamacSys_Parts; DESCRIPTION: TPS54232D, Switching Regulator, Buck Controller, 2A, Adjustable, Minimum of 0.8 V, 1200 kHz, 8-Pin SOIC; HEIGHT: 1.75mm; MANUFACTURER_NAME: Texas Instruments; MANUFACTURER_PART_NUMBER: TPS54232D; MOUSER_PART_NUMBER: 595-TPS54232D; MOUSER_PRICE-STOCK: https://www.mouser.com/Search/Refine.aspx?Keyword=595-TPS54232D
IC5 = SamacSys_Parts; DESCRIPTION: 4.5-V to 17-V input, 3-A synchronous step-down voltage regulator; HEIGHT: 0.6mm; MANUFACTURER_NAME: Texas Instruments; MANUFACTURER_PART_NUMBER: TPS563231DRLR; MOUSER_PART_NUMBER: 595-TPS563231DRLR; MOUSER_PRICE-STOCK: https://www.mouser.com/Search/Refine.aspx?Keyword=595-TPS563231DRLR
IC6 = SamacSys_Parts; DESCRIPTION: Microchip ATECC508A-MAHDA-T 10kb 8-Pin Crypto Authentication IC UDFN; HEIGHT: 0.6mm; MANUFACTURER_NAME: Microchip; MANUFACTURER_PART_NUMBER: ATECC508A-MAHDA-T; MOUSER_PART_NUMBER: 556-ATECC508A-MAHDAT; MOUSER_PRICE-STOCK: https://www.mouser.com/Search/Refine.aspx?Keyword=556-ATECC508A-MAHDAT
IC7 = SPBTLE-RF; AVAILABILITY: Unavailable; DESCRIPTION: Very low power module for Bluetooth Smart v4.1; MF: STMicroelectronics; MP: SPBTLE-RF; PACKAGE: SMD-11 STMicroelectronics; PRICE: None
IC8 = SamacSys_Parts; DESCRIPTION: IC FLASH 16MBIT 133MHZ 8WSON; HEIGHT: 0.8mm; MANUFACTURER_NAME: Winbond; MANUFACTURER_PART_NUMBER: W25Q16JVZPIQ; MOUSER_PART_NUMBER: 454-W25Q16JVZPIQ; MOUSER_PRICE-STOCK: https://www.mouser.com/Search/Refine.aspx?Keyword=454-W25Q16JVZPIQ
IC9 = SamacSys_Parts; DESCRIPTION: CAN Interface IC Dual high-speed CAN transceiver with Standby mode; HEIGHT: 1mm; MANUFACTURER_NAME: Nexperia; MANUFACTURER_PART_NUMBER: TJA1048TK,118; MOUSER_PART_NUMBER: 771-TJA1048TK118; MOUSER_PRICE-STOCK: https://www.mouser.com/Search/Refine.aspx?Keyword=771-TJA1048TK118
IC10 IC11 = SamacSys_Parts; DESCRIPTION: Stand-Alone CAN Controller SPI TSSOP20 Microchip MCP2515T-I/ST, CAN Controller 1Mbit/s CAN 2.0B, 20-Pin TSSOP; HEIGHT: 1.2mm; MANUFACTURER_NAME: Microchip; MANUFACTURER_PART_NUMBER: MCP2515T-I/ST; MOUSER_PART_NUMBER: 579-MCP2515T-I/ST; MOUSER_PRICE-STOCK: https://www.mouser.com/Search/Refine.aspx?Keyword=579-MCP2515T-I%2FST
IC12 IC13 = SamacSys_Parts; DESCRIPTION: SMD Ceramic Resonator 16 MHz 15PF CSTCE16M0V53C-R0, Ceramic Resonator, 16MHz Expander 15pF, 4-Pin, 3.2 x 1.3 x 0.9mm; HEIGHT: 1mm; MANUFACTURER_NAME: Murata Electronics; MANUFACTURER_PART_NUMBER: CSTCE16M0V53C-R0; MOUSER_PART_NUMBER: 81-CSTCE16M0V53C-R0; MOUSER_PRICE-STOCK: https://www.mouser.com/Search/Refine.aspx?Keyword=81-CSTCE16M0V53C-R0
J1 = SamacSys_Parts; DESCRIPTION: Memory Card Connectors microSIM LOW PROFILE PUSH-PUSH; HEIGHT: mm; MANUFACTURER_NAME: JAE Electronics; MANUFACTURER_PART_NUMBER: SF56S006V4BR2000; MOUSER_PART_NUMBER: 656-SF56S006V4BR2000; MOUSER_PRICE-STOCK: https://www.mouser.com/Search/Refine.aspx?Keyword=656-SF56S006V4BR2000
J2 = SamacSys_Parts; DESCRIPTION: MICRO SD card socket, push-pull 1.42H Normal type; HEIGHT: mm; MANUFACTURER_NAME: Molex; MANUFACTURER_PART_NUMBER: 1040310811; MOUSER_PART_NUMBER: N/A; MOUSER_PRICE-STOCK: https://www.mouser.com/Search/Refine.aspx?Keyword=N%2FA
J3 = SamacSys_Parts; DESCRIPTION: AMPHENOL RF - FA1-NCRP-PCB-8 - RF COAXIAL, SMB/FAKRA, R/A PLUG, PCB; HEIGHT: 8mm; MANUFACTURER_NAME: Amphenol RF; MANUFACTURER_PART_NUMBER: FA1-NCRP-PCB-8; MOUSER_PART_NUMBER: 523-FA1-NCRP-PCB-8; MOUSER_PRICE-STOCK: https://www.mouser.com/Search/Refine.aspx?Keyword=523-FA1-NCRP-PCB-8
J4 = SamacSys_Parts; DESCRIPTION: 14 way microfit 3mm dual row r/a header Molex MICRO-FIT 3.0 Series, Series Number 43045, 3mm Pitch 14 Way 2 Row Shrouded Right Angle PCB Header, Through Hole; HEIGHT: mm; MANUFACTURER_NAME: Molex; MANUFACTURER_PART_NUMBER: 43045-1400; MOUSER_PART_NUMBER: 538-43045-1400; MOUSER_PRICE-STOCK: https://www.mouser.com/Search/Refine.aspx?Keyword=538-43045-1400
J5 = MKRNB1500_V3.0; CODE-ARDUINO: 2219; DATASHEET: https://www.hirose.com/product/en/download_file/key_name/ZX/category/Catalog/doc_file_id/31704/?file_category_id=4&item_id=13&is_series=1; DISTRIBUTOR-LINK: http://www.digikey.com/product-detail/en/hirose-electric-co-ltd/ZX62-AB-5PA(31)/H125279CT-ND/5994741; DISTRIBUTOR-PN: H125279CT-ND; MANUFACTURER: Hirose; MANUFACTURER-PN: ZX62-AB-5PA(31)
J6 = SamacSys_Parts; DESCRIPTION: AMPHENOL RF - FA1-NDRP-PCB-8 - RF CONNECTOR, SMB, R/A PLUG, PCB; HEIGHT: 10.3mm; MANUFACTURER_NAME: Amphenol RF; MANUFACTURER_PART_NUMBER: FA1-NDRP-PCB-8; MOUSER_PART_NUMBER: 523-FA1-NDRP-PCB-8; MOUSER_PRICE-STOCK: https://www.mouser.com/Search/Refine.aspx?Keyword=523-FA1-NDRP-PCB-8
J7 = SamacSys_Parts; DESCRIPTION: HARWIN Archer M50, 1.27mm Pitch, 10 Way, 2 Row Unshrouded, Right Angle Pin Header, Surface Mount, Solder Termination; HEIGHT: 5mm; MANUFACTURER_NAME: HARWIN; MANUFACTURER_PART_NUMBER: M50-3600542R; MOUSER_PART_NUMBER: 855-M50-3600542R; MOUSER_PRICE-STOCK: https://www.mouser.com/Search/Refine.aspx?Keyword=855-M50-3600542R
K1 = SamacSys_Parts; DESCRIPTION: Relay Signal 2FormC 3V 10uA; HEIGHT: 10mm; MANUFACTURER_NAME: Kemet; MANUFACTURER_PART_NUMBER: EE2-3TNU-L; MOUSER_PART_NUMBER: 80-EE2-3TNU-L; MOUSER_PRICE-STOCK: https://www.mouser.com/Search/Refine.aspx?Keyword=80-EE2-3TNU-L
L1 = SamacSys_Parts; DESCRIPTION: Power Inductor semi-shielded SMD 15uH Bourns SRN6045 Series Shielded Wire-wound SMD Inductor with a Ferrite Core, 15 uH +/-20% Wire-Wound 2.3A Idc; HEIGHT: mm; MANUFACTURER_NAME: Bourns; MANUFACTURER_PART_NUMBER: SRN6045-150M; MOUSER_PART_NUMBER: 652-SRN6045-150M; MOUSER_PRICE-STOCK: https://www.mouser.com/Search/Refine.aspx?Keyword=652-SRN6045-150M
L2 = SamacSys_Parts; DESCRIPTION: Inductor Power Shielded Wirewound 4.7uH 30% 100KHz 12Q-Factor Ferrite 5.5A 9.5mOhm DCR T/R; HEIGHT: 5.1mm; MANUFACTURER_NAME: Bourns; MANUFACTURER_PART_NUMBER: SRU1048-4R7Y; MOUSER_PART_NUMBER: 652-SRU1048-4R7Y; MOUSER_PRICE-STOCK: https://www.mouser.com/Search/Refine.aspx?Keyword=652-SRU1048-4R7Y
L3 = SamacSys_Parts; DESCRIPTION: Inductor RF Chip Multi-Layer 27nH 5% 100MHz 10Q-Factor Ceramic 300mA 600mOhm DCR 0603 T/R; HEIGHT: 0.95mm; MANUFACTURER_NAME: JOHANSON TECHNOLOGY; MANUFACTURER_PART_NUMBER: L-14C27NJV4T
L4 = SamacSys_Parts; DESCRIPTION: Murata LQG15HN Series Type 1005 Wire-wound SMD Inductor with a Non-Magnetic Ceramic Core, 39 nH +/-5% Multilayer; HEIGHT: 0.55mm; MANUFACTURER_NAME: Murata Electronics; MANUFACTURER_PART_NUMBER: LQG15HN39NJ02D
LED3 = SamacSys_Parts; DESCRIPTION: Broadcom HSMS-C190 Red LED, 626 nm 1608 (0603), Rectangle Lens SMD package; HEIGHT: 0.9mm; MANUFACTURER_NAME: Avago Technologies; MANUFACTURER_PART_NUMBER: HSMS-C190; MOUSER_PART_NUMBER: 630-HSMS-C190; MOUSER_PRICE-STOCK: https://www.mouser.com/Search/Refine.aspx?Keyword=630-HSMS-C190
LED4 = SamacSys_Parts; DESCRIPTION: ChipLED,blue,469nm,55mcd,78mW,140deg Avago Blue LED, 55 mcd 140 0603; HEIGHT: 0.8mm; MANUFACTURER_NAME: Avago Technologies; MANUFACTURER_PART_NUMBER: HSMR-C190; MOUSER_PART_NUMBER: 630-HSMR-C190; MOUSER_PRICE-STOCK: https://www.mouser.com/Search/Refine.aspx?Keyword=630-HSMR-C190
Q1 Q4 = SamacSys_Parts; DESCRIPTION: Diodes Inc 2N7002DW-7-F Dual N-channel MOSFET, 115 mA, 60 V, 6-Pin SOT-363; HEIGHT: 1mm; MANUFACTURER_NAME: Diodes Inc.; MANUFACTURER_PART_NUMBER: 2N7002DW-7-F; MOUSER_PART_NUMBER: 621-2N7002DW-F; MOUSER_PRICE-STOCK: https://www.mouser.com/Search/Refine.aspx?Keyword=621-2N7002DW-F
Q2 Q3 = SamacSys_Parts; DESCRIPTION: MOSFET N-Channel 60V 0.3A TO236AB NXP 2N7002,215 N-channel MOSFET Transistor, 0.3 A, 60 V, 3-Pin TO-236AB; HEIGHT: 1.1mm; MANUFACTURER_NAME: Nexperia; MANUFACTURER_PART_NUMBER: 2N7002,215; MOUSER_PART_NUMBER: 771-2N7002-T/R; MOUSER_PRICE-STOCK: https://www.mouser.com/Search/Refine.aspx?Keyword=771-2N7002-T%2FR
Q5 Q6 = SamacSys_Parts; DESCRIPTION: INFINEON - BSP76E6433HUMA1 - POWER LOAD SW, AEC-Q100, 42V, SOT-223-4; HEIGHT: 1.7mm; MANUFACTURER_NAME: Infineon; MANUFACTURER_PART_NUMBER: BSP76E6433HUMA1
R1 R15 R22-R31 R36 R40 = SamacSys_Parts; DESCRIPTION: CRCW0402 Resistor T/R 0.063W,1%,10K2 Vishay CRCW Series Thick Film Surface Mount Resistor 0402 Case 10.2k +/-1% 0.063W +/-100ppm/C; HEIGHT: 0.4mm; MANUFACTURER_NAME: Vishay; MANUFACTURER_PART_NUMBER: CRCW040210K2FKED; MOUSER_PART_NUMBER: 71-CRCW0402-10.2K-E3; MOUSER_PRICE-STOCK: https://www.mouser.com/Search/Refine.aspx?Keyword=71-CRCW0402-10.2K-E3
R2 = SamacSys_Parts; DESCRIPTION: Vishay CRCW Series Thick Film Surface Mount Resistor 0402 Case 1.96k +/-1% 0.063W +/-100ppm/C; HEIGHT: 0.4mm; MANUFACTURER_NAME: Vishay; MANUFACTURER_PART_NUMBER: CRCW04021K96FKED; MOUSER_PART_NUMBER: 71-CRCW0402-1.96K-E3; MOUSER_PRICE-STOCK: https://www.mouser.com/Search/Refine.aspx?Keyword=71-CRCW0402-1.96K-E3
R3 = SamacSys_Parts; DESCRIPTION: Vishay CRCW Series Thick Film Surface Mount Resistor 0402 Case 28k +/-1% 0.063W +/-100ppm/C; HEIGHT: 0.4mm; MANUFACTURER_NAME: Vishay; MANUFACTURER_PART_NUMBER: CRCW040228K0FKED; MOUSER_PART_NUMBER: 71-CRCW0402-28K-E3; MOUSER_PRICE-STOCK: https://www.mouser.com/Search/Refine.aspx?Keyword=71-CRCW0402-28K-E3
R4 = SamacSys_Parts; DESCRIPTION: Res Thin Film 0603 10K Ohm 1% 0.125W(1/8W) +/-100ppm/C Sulfur Resistant Pad SMD T/R; HEIGHT: 0.5mm; MANUFACTURER_NAME: Stackpole Electronics Inc.; MANUFACTURER_PART_NUMBER: RNCP0603FTD10K0
R5 R14 R34 = SamacSys_Parts; DESCRIPTION: General Purpose Thick Film Surface Mount Chip Resistor; HEIGHT: 0.4mm; MANUFACTURER_NAME: Stackpole Electronics Inc.; MANUFACTURER_PART_NUMBER: RMCF0402ZT0R00
R6 R11 R12 R16-R19 R33 = SamacSys_Parts; DESCRIPTION: Vishay CRCW Series Thick Film Surface Mount Resistor 402 Case 1.2M +/-1% 0.063W +/-100ppm/C; HEIGHT: 0.4mm; MANUFACTURER_NAME: Vishay; MANUFACTURER_PART_NUMBER: CRCW04021M20FKED; MOUSER_PART_NUMBER: 71-CRCW04021M20FKED; MOUSER_PRICE-STOCK: https://www.mouser.com/Search/Refine.aspx?Keyword=71-CRCW04021M20FKED
R7 = SamacSys_Parts; DESCRIPTION: Vishay CRCW Series Thick Film Surface Mount Resistor 0402 Case 37.4k +/-1% 0.063W +/-100ppm/C; HEIGHT: 0.4mm; MANUFACTURER_NAME: Vishay; MANUFACTURER_PART_NUMBER: CRCW040237K4FKED; MOUSER_PART_NUMBER: 71-CRCW0402-37.4K-E3; MOUSER_PRICE-STOCK: https://www.mouser.com/Search/Refine.aspx?Keyword=71-CRCW0402-37.4K-E3
R8 = SamacSys_Parts; DESCRIPTION: Vishay CRCW Series Thick Film Surface Mount Resistor 0402 Case 169k +/-1% 0.063W +/-100ppm/C; HEIGHT: 0.4mm; MANUFACTURER_NAME: Vishay; MANUFACTURER_PART_NUMBER: CRCW0402169KFKED; MOUSER_PART_NUMBER: 71-CRCW0402-169K-E3; MOUSER_PRICE-STOCK: https://www.mouser.com/Search/Refine.aspx?Keyword=71-CRCW0402-169K-E3
R9 = SamacSys_Parts; DESCRIPTION: VISHAY - CRCW040253K6FKED. - RES, THICK FILM, 53K6, 1%, 0.063W, 0402; HEIGHT: 0.4mm; MANUFACTURER_NAME: Vishay; MANUFACTURER_PART_NUMBER: CRCW040253K6FKED; MOUSER_PART_NUMBER: 71-CRCW0402-53.6K-E3; MOUSER_PRICE-STOCK: https://www.mouser.com/Search/Refine.aspx?Keyword=71-CRCW0402-53.6K-E3
R10 = SamacSys_Parts; DESCRIPTION: Thick Film Resistors - SMD 10K OHM 1%; HEIGHT: 0.26mm; MANUFACTURER_NAME: YAGEO (PHYCOMP); MANUFACTURER_PART_NUMBER: RC0201FR-0710KL; MOUSER_PART_NUMBER: 603-RC0201FR-0710KL; MOUSER_PRICE-STOCK: https://www.mouser.com/Search/Refine.aspx?Keyword=603-RC0201FR-0710KL
R13 = SamacSys_Parts; DESCRIPTION: Thick Film Resistors - SMD CRGCQ 0402 10R 1% SMD Resistor; HEIGHT: 0.35mm; MANUFACTURER_NAME: TE Connectivity / Holsworthy; MANUFACTURER_PART_NUMBER: CRGCQ0402F10R
R20 R21 = SamacSys_Parts; DESCRIPTION: CRG1206 Surface mount chip resistor, 0R0 TE Connectivity CRG1206 Series Thick Film Surface Mount Resistor 1206 Case 0 +/-1% 0.25W; HEIGHT: 0.65mm; MANUFACTURER_NAME: TE Connectivity; MANUFACTURER_PART_NUMBER: CRG1206ZR; MOUSER_PART_NUMBER: 279-CRG1206ZR; MOUSER_PRICE-STOCK: https://www.mouser.com/Search/Refine.aspx?Keyword=279-CRG1206ZR
R32 = SamacSys_Parts; DESCRIPTION: Thick Film Resistors - SMD CRGCQ 0402 470R 5% SMD Resistor; HEIGHT: 0.35mm; MANUFACTURER_NAME: TE Connectivity / Holsworthy; MANUFACTURER_PART_NUMBER: CRGCQ0402J470R
R35 = SamacSys_Parts; DESCRIPTION: CRCW0402 Resistor T/R 0.063W,1%,40K2 Vishay CRCW Series Thick Film Surface Mount Resistor 0402 Case 40.2k +/-1% 0.063W +/-100ppm/C; HEIGHT: 0.4mm; MANUFACTURER_NAME: Vishay; MANUFACTURER_PART_NUMBER: CRCW040240K2FKED; MOUSER_PART_NUMBER: 71-CRCW0402-40.2K-E3; MOUSER_PRICE-STOCK: https://www.mouser.com/Search/Refine.aspx?Keyword=71-CRCW0402-40.2K-E3
R37 R38 = rc-master
R39 = SamacSys_Parts; DESCRIPTION: Thick Film Resistors - SMD 0.2W 39ohms 1% High Power AEC-Q200; HEIGHT: 0.4mm; MANUFACTURER_NAME: Vishay; MANUFACTURER_PART_NUMBER: CRCW040239R0FKEDHP; MOUSER_PART_NUMBER: 71-CRCW040239R0FKEDH; MOUSER_PRICE-STOCK: https://www.mouser.com/Search/Refine.aspx?Keyword=71-CRCW040239R0FKEDH
S1 = SamacSys_Parts; DESCRIPTION: Tactile Switches Right Angle Edge Mounted Tact Switch; HEIGHT: 2mm; MANUFACTURER_NAME: E-Switch; MANUFACTURER_PART_NUMBER: TL4100AF120QG; MOUSER_PART_NUMBER: 612-TL4100AF120QG; MOUSER_PRICE-STOCK: https://www.mouser.com/Search/Refine.aspx?Keyword=612-TL4100AF120QG
TP3V3 TP3V8 TP5V TP_1V8 TP_MDCD TP_MPWR_ON TP_MRST TP_MRX TP_MTX TP_MUSBN TP_MUSBP TP_MVUSB = testpad
U1 = SamacSys_Parts; DESCRIPTION: Dual-Bit, 2-DIR pin Dual-Supply Bus Transceiver w/ Configurable Voltage Translation, 3-State Output; HEIGHT: mm; MANUFACTURER_NAME: Texas Instruments; MANUFACTURER_PART_NUMBER: SN74AVC2T245RSWR; MOUSER_PART_NUMBER: 595-SN74AVC2T245RSWR; MOUSER_PRICE-STOCK: https://www.mouser.com/Search/Refine.aspx?Keyword=595-SN74AVC2T245RSWR
U$1 = ubloxLib
Y1 = SamacSys_Parts; DESCRIPTION: Abracon 32.768kHz Crystal Unit +/-10ppm SMD 2-Pin 3.2 x 1.5 x 0.9mm; HEIGHT: 0.9mm; MANUFACTURER_NAME: ABRACON; MANUFACTURER_PART_NUMBER: ABS07-32.768KHz-1-T; MOUSER_PART_NUMBER: 815-ABS07-32.7K-1-T; MOUSER_PRICE-STOCK: https://www.mouser.com/Search/Refine.aspx?Keyword=815-ABS07-32.7K-1-T

## Nets
12V_OUT: F1.2 J4.13
+1V8: C44.1 IC2.4 R16.2 R17.2 TP_1V8.TP U1.6
+3V3: C8.2 C18.2 C19.2 C30.1 C31.2 C32.2 C33.2 C34.2 C36.1 C37.1 C45.2 C50.1 C51.2 C52.1 C53.1 C54.2 D10.1 D11.1 FB1.1 IC1.17 IC1.36 IC1.44 IC3.5 IC6.8 IC7.5 IC8.3 IC8.7 IC8.8 IC9.11 IC10.20 IC11.20 J2.4 J7.1 K1.1 K1.6 R4.2 R22.2 R23.2 R24.2 R25.2 R26.2 R27.2 R28.2 R29.2 R30.2 R31.2 R32.2 R40.2 TP3V3.TP U1.7 U1.10 U$1.7_VCC_IO U$1.8_VCC
+3V8: C9.2 C14.2 C15.2 C22.2 C23.2 C24.2 C25.2 C26.2 C28.2 IC2.51 IC2.52 IC2.53 IC3.1 L2.2 R9.2 TP3V8.TP
+12V: C1.2 C10.2 C12.2 C13.2 C39.2 F1.1 IC4.2 IC5.1 IC5.5 J4.8 R8.2 R35.2
CAN0H_OUT: D8.2 IC9.13 J4.9
CAN0L_OUT: D7.2 IC9.12 J4.2
CAN1H_OUT: D6.2 IC9.10 J4.10
CAN1L_OUT: D5.2 IC9.9 J4.3
CODE_A_IN: J4.11 K1.4
CODE_A_OUT: J4.4 K1.5
CODE_B_IN: J4.12 K1.9
CODE_B_OUT: J4.5 K1.10
G_SCL: R38.2 U$1.17_SCL
G_SDA: R37.2 U$1.16_SDA
GND: C1.1 C3.1 C4.1 C5.1 C6.1 C7.2 C8.1 C9.1 C10.1 C11.1 C12.1 C13.1 C14.1 C15.1 C16.1 C17.1 C18.1 C19.1 C20.1 C21.1 C22.1 C23.1 C24.1 C25.1 C26.1 C27.1 C28.1 C29.2 C30.2 C31.1 C32.1 C33.1 C34.1 C35.2 C36.2 C37.2 C39.1 C40.1 C43.2 C44.2 C45.1 C46.1 C47.1 C48.1 C49.1 C50.2 C52.2 C53.2 C54.1 D1.2 D2.1 D3.1 D4.1 D5.1 D6.1 D7.1 D8.1 D13.1 D14.1 IC1.5 IC1.18 IC1.35 IC1.42 IC2.1 IC2.3 IC2.5 IC2.14 IC2.20 IC2.21 IC2.22 IC2.30 IC2.32 IC2.33 IC2.43 IC2.50 IC2.54 IC2.55 IC2.57 IC2.58 IC2.59 IC2.60 IC2.61 IC2.63 IC2.64 IC2.65 IC2.66 IC2.67 IC2.68 IC2.69 IC2.70 IC2.71 IC2.72 IC2.73 IC2.74 IC2.75 IC2.76 IC2.77 IC2.78 IC2.79 IC2.80 IC2.81 IC2.82 IC2.83 IC2.84 IC2.85 IC2.86 IC2.87 IC2.88 IC2.89 IC2.90 IC2.91 IC2.92 IC2.93 IC2.94 IC2.95 IC2.96 IC3.2 IC4.7 IC5.3 IC6.4 IC7.6 IC8.4 IC8.9 IC9.2 IC9.5 IC10.10 IC11.10 IC12.2 IC13.2 J1.4 J1.7 J1.9 J1.10 J1.11 J2.6 J3.1 J3.2 J3.3 J3.4 J4.1 J4.6 J5.5 J6.1 J6.2 J6.3 J6.4 J7.3 J7.5 J7.9 L4.1 LED3.1 Q1.1 Q1.4 Q2.2 Q3.2 Q4.1 Q4.4 Q5.3 Q6.3 R2.1 R6.1 R7.1 R10.1 R11.1 R12.1 R14.2 R18.1 R19.1 R33.1 R36.1 S1.1 S1.3 S1.4 U1.1 U1.2 U1.3 U$1.1_GND U$1.10_GND U$1.12_GND
GPS_ANT: J3.5 L3.2 U$1.11_RF_IN
GPS_BCKP: R5.1 U$1.6_V_BCKP
GRST: Q2.3 U$1.9_RESET_N
LOCK_OUT: J4.14 R20.2
M_ANT_OUT: C42.2 J6.5
M_SCL: IC2.27 R38.1
M_SDA: IC2.26 R37.1
M_USB_N: IC2.28 TP_MUSBN.TP
M_USB_P: IC2.29 TP_MUSBP.TP
M_VUSB: IC2.17 TP_MVUSB.TP
MCTS: IC2.11 R34.1
MDTR: IC2.9 R14.1
MRI: IC2.7
MRST: IC2.18 Q4.3 TP_MRST.TP
MRTS: IC2.10 R34.2
MRX: IC2.13 TP_MRX.TP U1.4
MTX: IC2.12 TP_MTX.TP U1.5
N$1: C20.2 C21.2 FB1.2 IC1.6
N$2: C41.1 IC2.56
N$3: IC2.16 R15.2
N$5: C2.2 IC4.1
N$6: C2.1 D1.1 IC4.8 L1.1
N$7: C3.2 IC4.6 R3.2
N$8: C4.2 R3.1
N$9: IC4.5 R1.1 R2.2
N$10: D9.2 R4.1
N$11: C5.2 IC4.4
N$12: C7.1 D9.1 R5.2
N$13: IC4.3 R7.2 R8.1
N$15: D11.2 K1.7 Q1.3
N$16: C38.1 IC5.2 L2.1
N$18: IC5.6 R9.1 R10.2
N$19: D10.2 K1.12 Q1.6
N$20: C38.2 IC5.4
N$21: J7.10 R39.1
N$22: LED3.2 R15.1
N$23: D12.4 J5.1
N$24: IC2.8 TP_MDCD.TP
N$26: C29.1 IC1.43
N$27: IC10.9 IC12.1
N$28: Q6.2 Q6.4 R21.1
N$29: Q5.2 Q5.4 R20.1
N$30: IC10.8 IC12.3
N$31: IC9.14 R30.1
N$32: IC11.9 IC13.1
N$33: IC11.8 IC13.3
N$34: IC9.8 R31.1
N$35: LED4.2 U$1.4_TIMEPULSE
N$36: LED4.1 R32.1
N$37: C43.1 D12.1 J5.6 J5.7 J5.8 J5.9 J5.10 J5.11 R33.2
N$38: R13.2 U$1.14_VCC_RF
N$39: IC11.19 R25.1
N$40: C40.2 L3.1 R13.1
N$42: IC10.19 R27.1
N$43: C41.2 C42.1 L4.2
PA00_XIN32: C16.2 IC1.1 Y1.2
PA01_XOUT32: C17.2 IC1.2 Y1.1
PA02_AIN0: IC1.3 IC11.18 R24.1
PA03_VREFA: IC1.4
PA04_AIN4: IC1.9 IC7.11
PA05_AIN5_LOCK: IC1.10 Q5.1
PA06_AIN6_UNLOCK: IC1.11 Q6.1
PA07_AIN7: IC1.12 IC11.13 R29.1
PA08_S0_I2C_SDA: IC1.13 IC6.5
PA09_S0_I2C_SCL: IC1.14 IC6.6
PA10_TCC0-W2_VIN: IC1.15 R35.1 R36.2
PA11_TCC0-W3: IC1.16 IC10.18 R26.1
PA12_S2_TX: IC1.21 U1.8
PA13_S2_RX [signal]: IC1.22 U1.9
PA14_IMM_OFF: IC1.23 Q1.5 R12.2
PA15_IMM_ON: IC1.24 Q1.2 R11.2
PA16_S1_MOSI: IC1.25 IC8.5 IC10.16 IC11.16 J2.3
PA17_S1_SCK: IC1.26 IC8.6 IC10.14 IC11.14 J2.5
PA18_OTG: IC1.27 J5.4
PA19_S1_MISO: IC1.28 IC8.2 IC10.17 IC11.17 J2.7
PA20_TCC0-W6: IC1.29 IC7.8
PA21_TCC0-W7: IC1.30 IC10.13 R28.1
PA22_TC4-W0: IC1.31 IC7.9
PA23_TC4-W1: IC1.32 IC7.7
PA24_USB_N: D12.3 IC1.33 J5.2
PA25_USB_P: D12.2 IC1.34 J5.3
PA27_GRST: IC1.39 Q2.1 R6.2
PA28_S2_PWRON: IC1.41 Q4.2 R18.2
PA30_SWCLK: IC1.45 J7.4
PA31_SWDIO: IC1.46 J7.2
PB02_AIN10: IC1.47 IC7.10
PB03_AIN11: IC1.48 IC7.4
PB08_RST: IC1.7 Q4.5 R19.2
PB09: IC1.8
PB10_TCC0-W4: IC1.19 J2.2 R23.1
PB11_TCC0-W5: IC1.20 IC8.1 R22.1
PB22_S5_TX: FB2.2 IC1.37
PB23_S5_RX: FB3.2 IC1.38
PWR_ON: IC2.15 Q4.6 TP_MPWR_ON.TP
RESETN: C51.1 IC1.40 R39.2 R40.1 S1.2
RXCAN0: IC9.4 IC10.2
RXCAN1: IC9.7 IC11.2
SCLK: C48.2 D2.2 IC2.38 J1.3
SIM_DET: IC2.42 Q3.3 R17.1
SIO: C47.2 D3.2 IC2.39 J1.6
SRST: C46.2 D4.2 IC2.40 J1.2
SSW: D14.2 J1.8 Q3.1 R16.1
SVCC: C27.2 C49.2 D13.2 IC2.41 J1.1
TXCAN0: IC9.1 IC10.1
TXCAN1: IC9.6 IC11.1
UB_GPS_RX: FB2.1 U$1.3_RXD
UB_GPS_TX: FB3.1 U$1.2_TXD
UNLOCK_OUT: J4.7 R21.2
VIN: C6.2 C11.2 C35.1 IC9.3 L1.2 R1.2 TP5V.TP